# Altium PCB HV_DAC_1PPM.PcbDoc (part 3 of 5)
Units mm, origin at the board's own origin, x right, y up, seen from the top; angles counter-clockwise.
Board outline 148 x 86 mm, 6 copper layers (Layer 1, Layer 2, Layer 3, Layer 4, Layer 5, Layer 6), stack 1.615 mm thick; 392 components, 227 nets, 1037 pads, 645 vias.
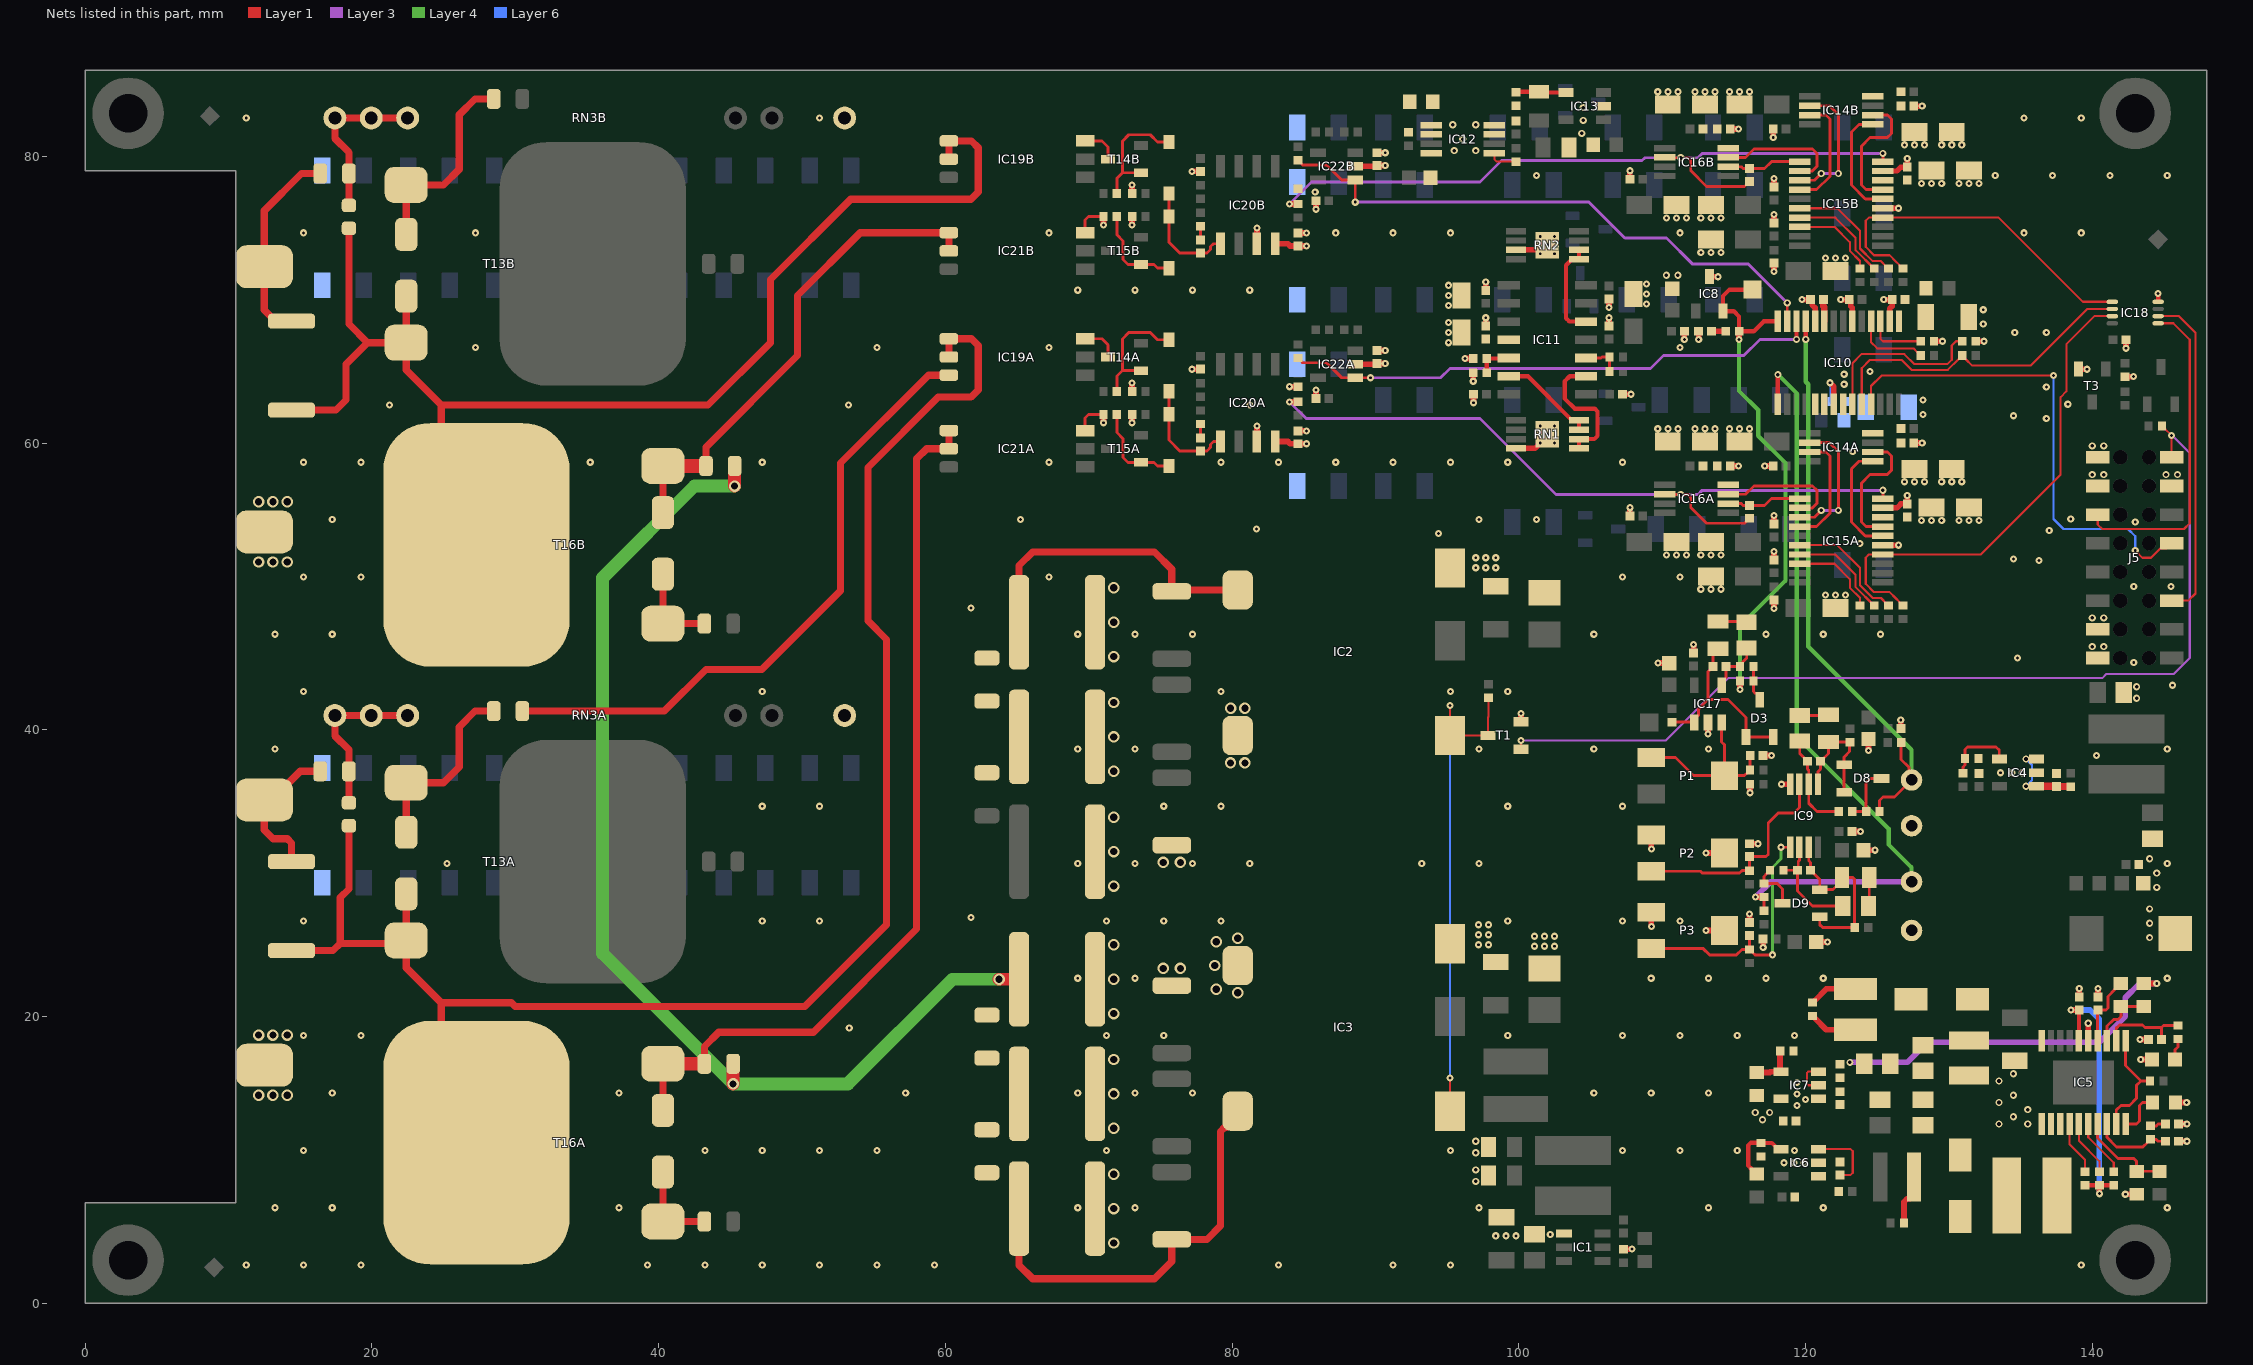
[diagram p6: the nets of this part, all layers, seen from the top]

## Part data (continued)
C54 C58: library part CC0603_1UF_16V_10%_X7R, "Non-polarised capacitor", Case=0603, Manufacturer=GENERIC, Manufacturer1 ComponentHeight=0.9mm, Manufacturer1 Example="YAGEO PHYCOMP", Manufacturer1 Part Number=223878615663, Tolerance=±10%, Voltage=16V, Author="CERN DEM JLC", Component Type=Standard, CreateDate=12/3/2007, HelpURL=\\cern.ch\dfs\Applications\Altium\Datasheets\CC0603_X7R_PHYCOMP.pdf, LatestRevisionDate=4/17/2015, Manufacturer Part Number=CC0603_1UF_16V_10%_X7R, Mounted=Yes, Part Description="SMD Multilayer Chip Ceramic Capacitor", Part Number=CC0603_1UF_16V_10%_X7R, Pin Count=2, Sense=No, SMD=Yes, Socket=No, Status=None, TC=X7R
C71A C71B: library part CC0402_10PF_50V_5%_C0G, "Non-polarised capacitor", Case=0402, Manufacturer=GENERIC, Manufacturer1 ComponentHeight=0.55mm, Manufacturer1 Example=KEMET, Manufacturer1 Part Number=C0402C100J5GACTU, Tolerance=±5%, Voltage=50V, Author="CERN DEM JLC", Component Type=Standard, CreateDate=12/3/2007, HelpURL="\\cern.ch\dfs\Applications\Altium\Datasheets\CC0402_C0G_KEMET_(Commercial Grade).pdf", LatestRevisionDate=4/22/2015, Manufacturer Part Number=CC0402_10PF_50V_5%_C0G, Mounted=Yes, Part Description="SMD Multilayer Chip Ceramic Capacitor", Part Number=CC0402_10PF_50V_5%_C0G, Pin Count=2, Sense=No, SMD=Yes, Socket=No, Status=Preferred, TC=C0G/NP0
C83A C83B: library part CC0402_22NF_50V_5%_X7R, "Non-polarised capacitor", Case=0402, Manufacturer=GENERIC, Manufacturer1 ComponentHeight=0.55mm, Manufacturer1 Example=KEMET, Manufacturer1 Part Number=C0402C223J5RAC, Tolerance=±5%, Voltage=50V, Author="CERN DEM BC", Component Type=Standard, CreateDate=7/15/2020, HelpURL=\\cern.ch\dfs\Applications\Altium\Datasheets\CC0402_X7R_KEMET.pdf, LatestRevisionDate=7/15/2020, Manufacturer Part Number=CC0402_22NF_50V_5%_X7R, Mounted=Yes, Part Description="SMD Multilayer Chip Ceramic Capacitor", Part Number=CC0402_22NF_50V_5%_X7R, Pin Count=2, Sense=No, SMD=Yes, Socket=No, Status=Preferred, TC=X7R
C85A C85B: library part CC0603_3.3NF_100V_1%_C0G, "Non-polarised capacitor", Case=0603, Manufacturer=GENERIC, Manufacturer1 ComponentHeight=0.87mm, Manufacturer1 Example=KEMET, Manufacturer1 Part Number=C0603C332F1GEC, Tolerance=±1%, Voltage=100V, Author="CERN DEM HF", Component Type=Standard, CreateDate=2/7/2024, HelpURL=\\cern.ch\dfs\Applications\Altium\Datasheets\CC0603_ESD_C0G_KEMET.pdf, LatestRevisionDate=2/7/2024, Manufacturer Part Number=CC0603_3.3NF_100V_1%_C0G, Mounted=Yes, Part Description="SMD Multilayer Chip Ceramic Capacitor", Part Number=CC0603_3.3NF_100V_1%_C0G, Pin Count=2, Sense=No, SMD=Yes, Socket=No, Status=None, TC=C0G/NP0
D1 D2: "Schottky Diode", Case=DO-214AC, Manufacturer="ON SEMICONDUCTOR", Manufacturer Part Number=MBRA340T3, Power=3A, Voltage=40V, Author="CERN DEM JLC", Bonding=No, Component Type=Standard, ComponentHeight=2.20mm, CreateDate=6/18/2012, Device=MBRA340T3G, HelpURL=\\cern.ch\dfs\Applications\Altium\Datasheets\MBRA340T3G.pdf, LatestRevisionDate=5/24/2022, Mounted=Yes, PackageDescription="DO-214-AC/SMA Diode, Molded Body; 5.21mm L X 2.60mm W X 2.20mm H, IPC Medium Density", Part Description="Schottky Power Rectifier", Part Number=MBRA340T3G, Pin Count=2, PressFit=No, Sense=No, SMD=Yes, Socket=No
D3 D8 D9: "Dual Common Anode Zener Diode", Case=SOT23-3, Manufacturer=PANASONIC, Power=200mA, Voltage=6.2V, Author="CERN DEM JLC", Bonding=No, Component Type=Standard, ComponentHeight=1.40mm, CreateDate=30/09/2014, Device=DZ3X062D0L, HelpURL=\\cern.ch\dfs\Applications\Altium\Datasheets\DZ3X062D0L.pdf, LatestRevisionDate=30/09/2014, Manufacturer Part Number=DZ3X062D0L, Mounted=Yes, PackageDescription="SOT, 0.95mm Pitch; 3 Pin, 1.60mm W X 2.975mm L X 1.40mm H Body, IPC Medium Density", Part Description="Dual Common Anode Silicon Epitaxial Planar Diode", Part Number=DZ3X062D0L, Pin Count=3, PressFit=No, Sense=No, SMD=Yes, Socket=No
D4A D4B D7A D7B: "Zener Diode", Case=DO-214AC, Manufacturer="ON SEMICONDUCTOR", Manufacturer Part Number=1SMA5931B, Power=1.5W, Voltage=18V, Author="CERN DEM BC", Bonding=No, Component Type=Standard, ComponentHeight=2.20mm, CreateDate=4/23/2020, Device=1SMA5931BT3G, HelpURL=\\cern.ch\dfs\Applications\Altium\Datasheets\1SMA5931BT3G.pdf, LatestRevisionDate=5/24/2022, Mounted=Yes, PackageDescription="DO-214-AC/SMA Diode, Molded Body; 5.21mm L X 2.60mm W X 2.20mm H, IPC Medium Density", Part Description="Zener Voltage Regulators", Part Number=1SMA5931BT3G, Pin Count=2, PressFit=No, Sense=No, SMD=Yes, Socket=No
D5A D5B D6A D6B: "Diode", Case=SOD-123, Manufacturer="VISHAY SEMICONDUCTORS", Power=150mA, Voltage=75V, Author="CERN DEM JLC", Bonding=No, Component Type=Standard, ComponentHeight=1.35mm, CreateDate=5/15/2017, Device=1N4448W, HelpURL=\\cern.ch\dfs\Applications\Altium\Datasheets\1N4448W.pdf, LatestRevisionDate=5/15/2017, Manufacturer Part Number=1N4448W, Mounted=Yes, PackageDescription="SOD Diode (SOD-123); 2.70mm W X 1.55mm L X 1.35mm H body, IPC Medium Density", Part Description="Surface Mount Small Signal Fast Switching Diode", Part Number=1N4448W, Pin Count=2, PressFit=No, Sense=No, SMD=Yes, Socket=No
FTG1 FTG2 FTG3 FTG4 FTG5 FTG6: library part FIDUCIAL_TARGET_S100-200, "Fiducial Target", Author="CERN DEM JLC", Component Type="Standard (No BOM)", ComponentHeight=0mm, CreateDate=09.02.2010, Family=Fiducial, HelpURL=Undefined, LatestRevisionDate=04.04.2012, Mounted=No, PackageDescription="Square Fiducial Target, Top Layer, 1.0mm, Top Solder 2.0mm, Keepout =2.0mm", Part Description="Square Fiducial Target, Top Layer, 1.0mm, Top Solder 2.0mm, Keepout =2.0mm", Part Number=FIDUCIAL_TARGET_S100-200, Pin Count=1, Sense=No, SMD=Yes, Socket=No, Status=None
IC1: "4.2V TO 18V INPUT, 2A LOW IQ SYNCHRONOUS BUCK CONVERTER", Case=SOT23-6, Manufacturer="DIODES INCORPORATED", Manufacturer Part Number=AP62201WU, Author="CERN DEM HF", Bonding=No, Component Type=Standard, ComponentHeight=1.1mm, CreateDate=1/7/2022, Device=AP62201WU-7, HelpURL=\\cern.ch\dfs\Applications\Altium\Datasheets\AP6220x.pdf, LatestRevisionDate=3/21/2022, Mounted=Yes, PackageDescription="SOT23, 0.95mm Pitch; 6 Pin, 1.625mm W X 2.90mm L X 1.00mm H body, IPC Medium Density", Part Description="4.2V To 18V Input, 2A Low Iq Synchronous Buck Converter", Part Number=AP62201WU-7, Pin Count=6, PressFit=No, Sense=No, SMD=Yes, Socket=No
IC2 IC3: "XP POWER, AG Series, DC/HVDC Converter", Manufacturer="XP POWER", Author="CERN DEM BC", Bonding=No, Component Type=Standard, ComponentHeight=3.3mm, CreateDate=9/18/2020, Device=AG20P-5, HelpURL=\\cern.ch\dfs\Applications\Altium\Datasheets\XPPOWER_AG-Series.pdf, LatestRevisionDate=9/18/2020, Manufacturer Part Number=AG20P-5, Mounted=Yes, PackageDescription="AG Series, DC/HVDC Converter, Body W 11.43mm x L 23.37mm x H 6.35mm", Part Description="5VDC to 0-2kVDC, Iout (max) 0.5mA, 1W DC-HVDC Converter", Part Number=AG20P-5, Pin Count=5, PressFit=No, Sense=No, SMD=Yes, Socket=No
IC4 IC6 IC13: "Adjustable Positive LDO Regulator, 1.2V Min, 20V Max, 0.42V Dropout, CMOS, PDSO5", Case/Package=SOT-23-5, Dropout Voltage=200mV, Input Bias Current=1uA, Manufacturer="Analog Devices", Max Operating Temperature=125°C, Max Output current=200mA, Max Output Voltage=19.58V, Max Supply Current=320uA, Max Supply Voltage=20V, Min Current Limit=250mA, Min Input Voltage=2.7V, Min Operating Temperature=-40°C, Min Output Voltage=1.2V, Operating Supply Current=180uA, Output Voltage=19.8V, Package Quantity=3000, Power Supply Rejection Ratio (PSRR)=50dB, Quiescent Current=140uA, Supplier Part Number=505-ADP7118AUJZ-R7CT-ND, Accuracy=0.8%, Category="Voltage Regulators - Linear", ComponentLink1Description=http://www.farnell.com/datasheets/2250589.pdf?src-supplier=Farnell, ComponentLink1URL=http://www.farnell.com/datasheets/2250589.pdf?src-supplier=Farnell, ComponentLink2Description=http://www.mouser.com/ds/2/609/ADP7118-876130.pdf?src-supplier=Mouser, ComponentLink2URL=http://www.mouser.com/ds/2/609/ADP7118-876130.pdf?src-supplier=Mouser, ComponentLink3Description=https://www.analog.com/media/en/technical-documentation/data-sheets/ADP7118.pdf?src-supplier=Digikey, ComponentLink3URL=https://www.analog.com/media/en/technical-documentation/data-sheets/ADP7118.pdf?src-supplier=Digikey, ComponentLink4Description=http://www.analog.com/static/imported-files/data_sheets/ADP7118.pdf?src-supplier=Avnet, ComponentLink4URL=http://www.analog.com/static/imported-files/data_sheets/ADP7118.pdf?src-supplier=Avnet, ComponentLink5Description=https://datasheet.octopart.com/ADP7118AUJZ-R7-Analog-Devices-datasheet-80865365.pdf?src-supplier=Newark, ComponentLink5URL=https://datasheet.octopart.com/ADP7118AUJZ-R7-Analog-Devices-datasheet-80865365.pdf?src-supplier=Newark, ComponentLink6Description=https://datasheet.octopart.com/ADP7118AUJZ-R7-Analog-Devices-datasheet-140248909.pdf?src-supplier=Element14, ComponentLink6URL=https://datasheet.octopart.com/ADP7118AUJZ-R7-Analog-Devices-datasheet-140248909.pdf?src-supplier=Element14, ComponentLink7Description=https://datasheet.octopart.com/ADP7118AUJZ-R7-Analog-Devices-datasheet-140566823.pdf?src-supplier=Arrow.cn, ComponentLink7URL=https://datasheet.octopart.com/ADP7118AUJZ-R7-Analog-Devices-datasheet-140566823.pdf?src-supplier=Arrow.cn, Contact Plating=Tin,Matte, Lead Free="Contains Lead", Manufacturer Part Number=ADP7118AUJZ-R7, Mounting Technology="Surface Mount", Number of Outputs=1, Number of Regulators=1, Output Configuration=Positive, Output Current=200mA, Output Type=Adjustable, Packaging="Tape and Reel", Pins=5, Polarity=Positive, Pricing="1=2.73, 10=2.033, 25=1.8596, 100=1.6689, 250=1.57808, 500=1.52332, 1000=1.47827 (USD)", RoHS=Yes, RoHS Compliant=Yes, Series=-, Stock=3209, Supplier=Digikey
IC5: "1A/0.6A, DC-to-DC Switching Regulator with Independent Positive and Negative Outputs", Case=SSOP20, Manufacturer="ANALOG DEVICES", Manufacturer Part Number=ADP5070ARE, Author="CERN DEM JLC", Bonding=No, Component Type=Standard, ComponentHeight=1.2mm, CreateDate=6/21/2017, Device=ADP5070AREZ, HelpURL=\\cern.ch\dfs\Applications\Altium\Datasheets\ADP5070AREZ.pdf, LatestRevisionDate=4/1/2022, Mounted=Yes, PackageDescription="SOP, 0.65mm Pitch; 20 Pin, 4.40mm W X 6.50mm L X 1.20mm H Body (w/Thermal Tab 3.05mm X 4.25mm), IPC Medium Density", Part Description="1A/0.6A, DC-to-DC Switching Regulator with Independent Positive and Negative Outputs", Part Number=ADP5070AREZ, Pin Count=20, PressFit=No, Sense=No, SMD=Yes, Socket=No
IC7: "-1.22V to -27V, -200mA, Adjustable, Low Noise, Negative Linear Regulator", Case=SOT23-5, Manufacturer="ANALOG DEVICES", Manufacturer Part Number=ADP7182AUJ, Author="CERN DEM JLC", Bonding=No, Component Type=Standard, ComponentHeight=0.9mm, CreateDate=6/16/2014, Device=ADP7182AUJZ-R7, HelpURL=\\cern.ch\dfs\Applications\Altium\Datasheets\ADP7182AUJZ-R7.pdf, LatestRevisionDate=4/4/2022, Mounted=Yes, PackageDescription="SOT23, 0.95mm Pitch; 5 Pin, 1.75mm W X 3.00mm L X 0.90mm H body, IPC Medium Density", Part Description="-1.22V to -27V, -200mA, Adjustable, Low Noise, Negative Linear Regulator", Part Number=ADP7182AUJZ-R7, Pin Count=5, PressFit=No, Sense=No, SMD=Yes, Socket=No
IC8: "-20° to +100°C ±3°C Precision Centigrade Temperature Sensors", Case=SOT23, Manufacturer="TEXAS INSTRUMENTS", Author="CERN DEM JLC", Bonding=No, Component Type=Standard, ComponentHeight=1.12mm, CreateDate=19/01/2011, Device=LM45CIM3/NOPB, HelpURL=\\cern.ch\dfs\Applications\Altium\Datasheets\LM45CIM3-NOPB.pdf, LatestRevisionDate=19/01/2011, Manufacturer Part Number=LM45CIM3/NOPB, Mounted=Yes, PackageDescription="SOT, 0.95mm Pitch; 3 Pin, 1.30mm W X 2.92mm L X 1.12mm H body, IPC Medium Density", Part Description="-20° to +100°C ±3°C Precision Centigrade Temperature Sensors", Part Number=LM45CIM3/NOPB, Pin Count=3, PressFit=No, Sense=No, SMD=Yes, Socket=No
IC9 IC14A IC14B: "Dual Operational Amplifier", Case=MSOP8, Manufacturer="ANALOG DEVICES", Manufacturer Part Number=AD8676ARM, Author="CERN DEM JLC", Bonding=No, Component Type=Standard, ComponentHeight=1.1mm, CreateDate=12/17/2013, Device=AD8676ARMZ, HelpURL=\\cern.ch\dfs\Applications\Altium\Datasheets\AD8676ARMZ.pdf, LatestRevisionDate=3/31/2022, Mounted=Yes, PackageDescription="SOP, 0.65mm Pitch; 8 Pin, 3.00mm W X 3.00mm L X 1.10mm H body, IPC Medium Density", Part Description="Ultraprecision, 36 V, 2.8 nV/sqrt Hz Dual Rail-to-Rail Output Operational Amplifier", Part Number=AD8676ARMZ, Pin Count=8, PressFit=No, Sense=No, SMD=Yes, Socket=No
IC10: "24-Bit Analog-to-Digital Converter for Temperature Sensors", Case=TSSOP28, Manufacturer="TEXAS INSTRUMENTS", Author="CERN DEM JLC", Bonding=No, Component Type=Standard, ComponentHeight=1.2mm, CreateDate=3/19/2012, Device=ADS1248IPWR, HelpURL=\\cern.ch\dfs\Applications\Altium\Datasheets\ADS1248IPWR.pdf, LatestRevisionDate=3/19/2012, Manufacturer Part Number=ADS1248IPWR, Mounted=Yes, PackageDescription="SOP, 0.65mm Pitch; 28 Pin, 4.40mm W X 9.70mm L X 1.20mm H body, IPC Medium Density", Part Description="24-Bit Analog-to-Digital Converter for Temperature Sensors", Part Number=ADS1248IPWR, Pin Count=28, PressFit=No, Sense=No, SMD=Yes, Socket=No
IC11: "Quad Operational Amplifier", Case=SOIC14, Manufacturer="ANALOG DEVICES", Manufacturer Part Number=ADA4077-4AR, Author="CERN DEM JLC", Bonding=No, Component Type=Standard, ComponentHeight=1.75mm, CreateDate=5/22/2018, Device=ADA4077-4ARZ, HelpURL=\\cern.ch\dfs\Applications\Altium\Datasheets\ADA4077-4ARZ.pdf, LatestRevisionDate=3/31/2022, Mounted=Yes, PackageDescription="SOIC 14, Pitch 1.27mm - Body 4x8.75mm, IPC Medium Density", Part Description="Quad 4 MHz, 7 nV/sqr Hz, Low Offset and Drift, High Precision Amplifier", Part Number=ADA4077-4ARZ, Pin Count=14, PressFit=No, Sense=No, SMD=Yes, Socket=No
IC12: library part LTC6655BHMS8-5#PBF, "0.25ppm Noise, Low Drift Precision Buffered Voltage Reference", Case=SSOP8, Manufacturer="LINEAR TECHNOLOGY", Author="CERN DEM JLC", Bonding=No, Component Type=Standard, ComponentHeight=1.1mm, CreateDate=6/7/2012, Device=LTC6655BHMS8-5, HelpURL=\\cern.ch\dfs\Applications\Altium\Datasheets\LTC6655BHMS8-5#PBF.pdf, LatestRevisionDate=6/7/2012, Manufacturer Part Number=LTC6655BHMS8-5, Mounted=Yes, PackageDescription="SOP, 8-Leads, Body 3.1x3.1mm (max), Pitch 0.65mm, IPC Medium Density", Part Description="5V, 0.25ppm Noise, Low Drift Precision Buffered Voltage Reference", Part Number=LTC6655BHMS8-5#PBF, Pin Count=8, PressFit=No, Sense=No, SMD=Yes, Socket=No
IC15A IC15B: "1 ppm 20-Bit, ±1 LSB INL, Voltage Output DAC", Case=TSSOP20, Manufacturer="ANALOG DEVICES", Manufacturer Part Number=AD5791BRU, Author="CERN DEM JLC", Bonding=No, Component Type=Standard, ComponentHeight=1.2mm, CreateDate=5/11/2011, Device=AD5791BRUZ, HelpURL=\\cern.ch\dfs\Applications\Altium\Datasheets\AD5791BRUZ.pdf, LatestRevisionDate=3/24/2022, Mounted=Yes, PackageDescription="SOP, 0.65mm Pitch; 20 Pin, 4.40mm W X 6.50mm L X 1.20mm H body, IPC Medium Density", Part Description="1 ppm 20-Bit, ±1 LSB INL, Voltage Output DAC", Part Number=AD5791BRUZ, Pin Count=20, PressFit=No, Sense=No, SMD=Yes, Socket=No
IC16A IC16B: "Operational Amplifier with Offset 1-8", Case=MSOP8, Manufacturer="ANALOG DEVICES", Manufacturer Part Number=AD8675ARM, Author="CERN DEM JMW", Bonding=No, Component Type=Standard, ComponentHeight=1.1mm, CreateDate=9/6/2011, Device=AD8675ARMZ, HelpURL=\\cern.ch\dfs\Applications\Altium\Datasheets\AD8675ARMZ.pdf, LatestRevisionDate=3/31/2022, Mounted=Yes, PackageDescription="SOP, 0.65mm Pitch; 8 Pin, 3.00mm W X 3.00mm L X 1.10mm H body, IPC Medium Density", Part Description="36V Precision, 2.8nV/sqrt Hz Rail-to-Rail Output Operational Amplifier", Part Number=AD8675ARMZ, Pin Count=8, PressFit=No, Sense=No, SMD=Yes, Socket=No
IC17 IC22A IC22B: "2.2nV/sqrt Hz, Low-Power, 36-V Operational Amplifier", Case="SOT 23-5", Manufacturer="TEXAS INSTRUMENTS", Component Type=Standard, Device=OPA207IDBVR, Manufacturer Part Number=OPA207IDBVR, PackageDescription="SOT, 0.95mm pitch; 5 pin, 1.60mm W X 2.90mm L X 1.45mm H body, IPC Medium Density", Part Description="2.2nV/sqrt Hz, Low-Power, 36-V Operational Amplifier", Part Number=OPA207IDBVR
IC18: "IC DECODER/DEMUX 1X2: 4 8VSSOP Decoder/Demultiplexer 1 x 2: 4 8-VSSOP", Case/Package=VSSOP, High Level Output Current=32mA, Manufacturer="Texas Instruments", Max Operating Temperature=85°C, Max Supply Voltage=5.5V, Min Operating Temperature=-40°C, Min Supply Voltage=1.65V, Quiescent Current=10uA, Supplier Part Number=595-SN74LVC1G139DCUR, Category="Integrated Circuits (ICs)", ComponentLink1Description=https://datasheet.ciiva.com/1888/sn74lvc1g139-1888859.pdf?src-supplier=Digikey, ComponentLink1URL=https://datasheet.ciiva.com/1888/sn74lvc1g139-1888859.pdf?src-supplier=Digikey, ComponentLink2Description=https://datasheet.ciiva.com/1888/sn74lvc1g139-1888860.pdf?src-supplier=Digikey, ComponentLink2URL=https://datasheet.ciiva.com/1888/sn74lvc1g139-1888860.pdf?src-supplier=Digikey, ComponentLink3Description=https://datasheet.ciiva.com/14293/sn74lvc1g139-14293589.pdf?src-supplier=Avnet, ComponentLink3URL=https://datasheet.ciiva.com/14293/sn74lvc1g139-14293589.pdf?src-supplier=Avnet, ComponentLink4Description=https://datasheet.ciiva.com/14294/sn74lvc1g139-14294935.pdf?src-supplier=Avnet, ComponentLink4URL=https://datasheet.ciiva.com/14294/sn74lvc1g139-14294935.pdf?src-supplier=Avnet, ComponentLink5Description=https://datasheet.ciiva.com/46430/1847422-46430989.pdf?src-supplier=Element14, ComponentLink5URL=https://datasheet.ciiva.com/46430/1847422-46430989.pdf?src-supplier=Element14, Height=900um, Independent Circuits=1, Lead Free=5697LeadFree, Length=2.3mm, Logic Function=Decoder,Demultiplexer, Low Level Output Current=32mA, Manufacturer Part Number=SN74LVC1G139DCUR, Mounting Technology="Surface Mount", Number of Bits=1, Number of Channels=1NUMBER, Number of Circuits=1, Number of Elements=1, Number of Input Lines=2, Number of Inputs=2, Number of Output Lines=4, Number of Outputs=4, Packaging="Tape and Reel", Pins=8, Polarity=Inverting, Pricing="1=0.38, 10=0.261, 50=0.235, 100=0.207, 1000=0.178, 10000=0.158 (USD)", Propagation Delay=16.7ns, Reach SVHC Compliant=No, RoHS=Yes, RoHS Compliant=Yes, Series=74LVC, Stock=29396, Supplier=Mouser, Supply Type=Single, Technology=CMOS, Thickness=850um, Throw Configuration="4340Throw Configuration", Weight=0.000339oz, Width=2mm
IC19A IC19B IC21A IC21B: "Optoisolator Photovoltaic Output 5000Vrms 2 Channel", Case=SOIC6, Manufacturer=TOSHIBA, Author="CERN DEM HF", Bonding=No, Component Type=Standard, ComponentHeight=2.2mm, CreateDate=6/7/2022, Device=TLP3910(C20-TP,E, HelpURL=\\cern.ch\dfs\Applications\Altium\Datasheets\TLP3910.pdf, LatestRevisionDate=6/7/2022, Manufacturer Part Number=TLP3910(C20-TP,E, Mounted=Yes, PackageDescription="TOSHIBA Case, SOIC, 1.27mm Pitch; 6  Pin, 7.5mm W X 3.84mm", Part Description="Optoisolator Photovoltaic Output 5000Vrms 2 Channel", Part Number=TLP3910(C20-TP,E, Pin Count=6, PressFit=No, Sense=No, SMD=Yes, Socket=No
IC20A IC20B: "Dual Operational Amplifier", Case=SOIC8, Manufacturer="TEXAS INSTRUMENTS", Author="CERN DEM BC", Bonding=No, Component Type=Standard, ComponentHeight=1.75mm, CreateDate=8/24/2016, Device=OPA2277U, HelpURL=\\cern.ch\dfs\Applications\Altium\Datasheets\OPA2277U.pdf, LatestRevisionDate=8/24/2016, Manufacturer Part Number=OPA2277U, Mounted=Yes, PackageDescription="SOIC 8, Pitch 1.27mm - Body 4x5mm, IPC Medium Density", Part Description="Dual High Precision, Operational Amplifier", Part Number=OPA2277U, Pin Count=8, PressFit=No, Sense=No, SMD=Yes, Socket=No
J1 J2 J3 J4: library part SMD_PAD_4X3MM, "Pad", Author="CERN DEM JLC", Component Type="Standard (No BOM)", ComponentHeight=0mm, CreateDate=3/15/2010, Family="SMD Pad", HelpURL=Undefined, LatestRevisionDate=3/15/2010, Mounted=No, PackageDescription="4mm x  3mm SMD Pad", Part Description="4mm x 3mm SMD Pad", Part Number=SMD_PAD_4X3MM, Pin Count=1, Sense=No, SMD=Yes, Socket=No, Status=None
J5: library part 62131621821, "Socket Header WR-PHD, Pitch 2.00 mm, SMT, Vertical, dual row, 16 pin", Contact Resistance="20 mOhm", Insulation Resistance=">1000 MOhm", Operating Temperature="-40 to 105 degC", Rated Current="2 A", Working Voltage="200 VAC", ComponentLink1Description=Manufacturer, ComponentLink1URL=http://www.we-online.de, ComponentLink2Description=Datasheet, ComponentLink2URL=http://katalog.we-online.com/em/datasheet/62131621821.pdf, Mounting Technology=SMT, Orientation=Vertical, Part Number=62131621821, Pin Number=16, Pitch="2.00 mm", Published Date="Jan. 2018", Publisher="Wurth Elektronik", Row Number=dual
L1 L3: library part IND_4.7UH_20%_WURTH_WE-SPC_74408943047, "Inductor With Core", Manufacturer="WURTH ELEKTRONIK", Manufacturer Part Number=74408943047, Power=2.2A, Resistance=0.045R, Tolerance=±20%, Author="CERN DEM JLC", Component Type=Standard, ComponentHeight=4.1mm, CreateDate=11/24/2014, HelpURL=\\cern.ch\dfs\Applications\Altium\Datasheets\IND_WURTH_WE-SPC_74408943047.pdf, LatestRevisionDate=7/5/2017, Mounted=Yes, Part Description="SMD Shielded Power Inductor (WE-SPC Series)", Part Number=IND_4.7UH_20%_WURTH_WE-SPC_74408943047, Pin Count=2, Sense=No, SMD=Yes, Socket=No
L2: library part IND_10UH_20%_BOURNS_PM43, "Inductor With Core", Manufacturer=BOURNS, Manufacturer Part Number=PM43-100M-RC, Power=1.15A, Resistance=0.18R, Tolerance=±20%, Author="CERN DEM JLC", Component Type=Standard, ComponentHeight=3.5mm, CreateDate=5/17/2011, HelpURL=\\cern.ch\dfs\Applications\Altium\Datasheets\IND_BOURNS_PM43.pdf, LatestRevisionDate=5/17/2011, Mounted=Yes, Part Description="SMD Power Inductor", Part Number=IND_10UH_20%_BOURNS_PM43, Pin Count=2, Sense=No, SMD=Yes, Socket=No
L4: library part IND_15UH_20%_WURTH_WE-SPC_74408943150, "Inductor With Core", Manufacturer="WURTH ELEKTRONIK", Manufacturer Part Number=74408943150, Power=1.4A, Resistance=0.118R, Tolerance=±20%, Author="CERN DEM MR", Component Type=Standard, ComponentHeight=4.1mm, CreateDate=6/30/2017, HelpURL=\\cern.ch\dfs\Applications\Altium\Datasheets\IND_WURTH_WE-SPC_74408943150.pdf, LatestRevisionDate=7/5/2017, Mounted=Yes, Part Description="SMD Shielded Power Inductor (WE-SPC Series)", Part Number=IND_15UH_20%_WURTH_WE-SPC_74408943150, Pin Count=2, Sense=No, SMD=Yes, Socket=No
L5: library part IND_1.5UH_20%_COILCRAFT_XAL4020, "Inductor With Core", Manufacturer=COILCRAFT, Manufacturer Part Number=XAL4020-152ME, Power=5.2A, Resistance=0.02145R, Tolerance=±20%, Author="CERN DEM BC", Component Type=Standard, ComponentHeight=2.1mm, CreateDate=8/7/2019, HelpURL=\\cern.ch\dfs\Applications\Altium\Datasheets\IND_COILCRAFT_XAL4020.pdf, LatestRevisionDate=8/31/2023, Mounted=Yes, Part Description="SMD Shielded Power Inductor", Part Number=IND_1.5UH_20%_COILCRAFT_XAL4020, Pin Count=2, Sense=No, SMD=Yes, Socket=No
L6: library part IND_2.2UH_20%_MURATA_LQH44PN2R2MP0L, "Inductor With Core", Case=4040, Manufacturer=MURATA, Manufacturer Part Number=LQH44PN2R2MP0L, Power=1.8A, Resistance=0R049, Tolerance=±20%, Author="CERN DEM JLC", Component Type=Standard, ComponentHeight=1.8mm, CreateDate=2/14/2018, HelpURL=\\cern.ch\dfs\Applications\Altium\Datasheets\IND_MURATA_LQH44PN_P0.pdf, LatestRevisionDate=2/14/2018, Mounted=Yes, Part Description="Wire Wound Ferrite Inductor for Power Lines", Part Number=IND_2.2UH_20%_MURATA_LQH44PN2R2MP0L, Pin Count=2, Sense=No, SMD=Yes, Socket=No
L7: library part IND_0.68UH_20%_BOURNS_SRP3212, "Inductor", Manufacturer=BOURNS, Manufacturer Part Number=SRP3212-R68M, Power=6.2A, Resistance=0.020R, Tolerance=±20%, Author="CERN DEM HF", Component Type=Standard, ComponentHeight=1.2mm, CreateDate=6/23/2022, HelpURL=\\cern.ch\dfs\Applications\Altium\Datasheets\IND_BOURNS_SRP3212.pdf, LatestRevisionDate=6/23/2022, Mounted=Yes, Part Description="Shielded SMD Power Inductor", Part Number=IND_0.68UH_20%_BOURNS_SRP3212, Pin Count=2, Sense=No, SMD=Yes, Socket=No
L8: library part IND0603_MURATA_BLM18PG471SN1D, Case=0603, Manufacturer=MURATA, Manufacturer Part Number=BLM18PG471SN1D, Power=1A, Resistance=0.2R, Tolerance=±25%, Author="CERN DEM BC", Component Type=Standard, ComponentHeight=0.95mm, CreateDate=17.02.2021, HelpURL=\\cern.ch\dfs\Applications\Altium\Datasheets\IND0603_MURATA_BLM18P.pdf, LatestRevisionDate=17.02.2021, Mounted=Yes, Part Description="SMD EMIFIL Chip Ferrite Bead", Part Number=IND0603_MURATA_BLM18PG471SN1D, Pin Count=2, Sense=No, SMD=Yes, Socket=No
P1: library part TRIM_12T_100K_BOURNS_3224X-1-104E, "Trimming Potentiometer", Case=3224X, Manufacturer=BOURNS, Manufacturer Part Number=3224X-1-104E, Power=0.25W, Tolerance=±10%, Author="CERN DEM JLC", Component Type=Standard, ComponentHeight=5.3mm, CreateDate=12/18/2012, HelpURL=\\cern.ch\dfs\Applications\Altium\Datasheets\TRIM_BOURNS_3224X.pdf, LatestRevisionDate=12/18/2012, Mounted=Yes, Part Description="12 Turns SMD Trimpot® Trimming Potentiometer (Top Adjust)", Part Number=TRIM_12T_100K_BOURNS_3224X-1-104E, Pin Count=3, PressFit=No, Sense=No, SMD=Yes, Socket=No, TC=±100ppm/°C
P2 P3: library part TRIM_12T_10K_BOURNS_3224X-1-103E, "Trimming Potentiometer", Case=3224X, Manufacturer=BOURNS, Manufacturer Part Number=3224X-1-103E, Power=0.25W, Tolerance=±10%, Author="CERN DEM JLC", Component Type=Standard, ComponentHeight=5.3mm, CreateDate=12/18/2012, HelpURL=\\cern.ch\dfs\Applications\Altium\Datasheets\TRIM_BOURNS_3224X.pdf, LatestRevisionDate=12/18/2012, Mounted=Yes, Part Description="12 Turns SMD Trimpot® Trimming Potentiometer (Top Adjust)", Part Number=TRIM_12T_10K_BOURNS_3224X-1-103E, Pin Count=3, PressFit=No, Sense=No, SMD=Yes, Socket=No, TC=±100ppm/°C
R1 R2 R6 R7: library part R1206_100K_0.1%_0.4W_25PPM_VISHAY_PAT, "Resistor - 0.1%", Case=1206, Manufacturer="VISHAY DALE THIN FILM", Manufacturer Part Number=PAT1206E1003BS, Power=0.4W, Tolerance=±0.1%, Author="CERN DEM MR", Component Type=Standard, ComponentHeight=0.5mm, CreateDate=7/19/2016, HelpURL=\\cern.ch\dfs\Applications\Altium\Datasheets\R1206_VISHAY_PAT.pdf, LatestRevisionDate=6/28/2022, Mounted=Yes, Part Description="Precision Automotive Thin Film Chip Resistor 2kV ESD Rating", Part Number=R1206_100K_0.1%_0.4W_25PPM_VISHAY_PAT, Pin Count=2, PressFit=No, Sense=No, SMD=Yes, Socket=No, Status="Not Recommended", TC=±25ppm/°C
R3 R21: library part R0603_52K3_0.1%_0.063W_10PPM, "Resistor - 0.1%", Case=0603, Manufacturer=GENERIC, Manufacturer1 ComponentHeight=0.5mm, Manufacturer1 Example="TYCO HOLSWORTHY", Manufacturer1 Part Number=RN73C1J52K3BTDF, Power=0.063W, Tolerance=±0.1%, Author="CERN DEM JLC", Component Type=Standard, CreateDate=12/3/2007, HelpURL=\\cern.ch\dfs\Applications\Altium\Datasheets\R0603_Tyco_RN73.pdf, LatestRevisionDate=3/13/2008, Manufacturer Part Number=R0603_52K3_0.1%_0.063W_10PPM, Mounted=Yes, Part Description="Thin Film Chip Resistor", Part Number=R0603_52K3_0.1%_0.063W_10PPM, Pin Count=2, PressFit=No, Sense=No, SMD=Yes, Socket=No, Status="Not Recommended", TC=±10ppm
R4 R5 R8 R11 R13 R17 R18 R23 R24 R25 R26 R32 R63 R101 R102 R103 R105 R106 R107 R108A R108B R109A R109B R110A R110B R111A R111B R117A R117B R137 R138 R143 R144 R145 R146: library part R0402_10K_1%_0.0625W_100PPM, "Resistor - 1%", Case=0402, Manufacturer=GENERIC, Manufacturer1 ComponentHeight=0.4mm, Manufacturer1 Example="YAGEO PHYCOMP", Manufacturer1 Part Number=232270671003L, Power=0.0625W, Tolerance=±1%, Author="CERN DEM JLC", Component Type=Standard, HelpURL=\\cern.ch\dfs\Applications\Altium\Datasheets\R0402_Phycomp_RC0402.pdf, Manufacturer Part Number=R0402_10K_1%_0.0625W_100PPM, Mounted=Yes, Part Description="General Purpose Thick Film Chip Resistor", Part Number=R0402_10K_1%_0.0625W_100PPM, Pin Count=2, PressFit=No, Sense=No, SMD=Yes, Socket=No, Status="Not Recommended", TC=±100ppm/°C
  R4 R5 R8 R11 R13 R17 R18 R23 R24 R25 R26 R32 R101 R102 R103 R105 R106 R107 R108A R108B R109A R109B R110A R110B R111A R111B R117A R117B R137 R138 R145 R146: CreateDate=12/3/2007, LatestRevisionDate=10/17/2012
  R63 R143 R144: CreateDate=03.12.2007, LatestRevisionDate=17.10.2012
R9 R15 R29: library part R0402_1R_1%_0.0625W_200PPM, "Resistor - 1%", Case=0402, Manufacturer=GENERIC, Manufacturer1 ComponentHeight=0.4mm, Manufacturer1 Example="YAGEO PHYCOMP", Manufacturer1 Part Number=232270671008L, Power=0.0625W, Tolerance=±1%, Author="CERN DEM JLC", Component Type=Standard, CreateDate=12/3/2007, HelpURL=\\cern.ch\dfs\Applications\Altium\Datasheets\R0402_Phycomp_RC0402.pdf, LatestRevisionDate=10/17/2012, Manufacturer Part Number=R0402_1R_1%_0.0625W_200PPM, Mounted=Yes, Part Description="General Purpose Thick Film Chip Resistor", Part Number=R0402_1R_1%_0.0625W_200PPM, Pin Count=2, PressFit=No, Sense=No, SMD=Yes, Socket=No, Status="Not Recommended", TC=±200ppm/°C
R10: library part R0402_31K6_0.1%_0.063W_25PPM_YAGEO_RT, "Resistor - 0.1%", Case=0402, Manufacturer=YAGEO, Manufacturer Part Number=RT0402BRD0731K6L, Power=0.063W, Tolerance=±0.1%, Voltage=50V, Author="CERN DEM BC", Component Type=Standard, ComponentHeight=0.35mm, CreateDate=7/30/2020, HelpURL=\\cern.ch\dfs\Applications\Altium\Datasheets\R0402_YAGEO_RT.pdf, LatestRevisionDate=7/30/2020, Mounted=Yes, Part Description="Thin Film Chip Resistor", Part Number=R0402_31K6_0.1%_0.063W_25PPM_YAGEO_RT, Pin Count=2, PressFit=No, Sense=No, SMD=Yes, Socket=No, Status="Not Recommended", TC=±25ppm/°C
R12: library part R0402_4R7_1%_0.0625W_200PPM, "Resistor - 1%", Case=0402, Manufacturer=GENERIC, Manufacturer1 ComponentHeight=0.4mm, Manufacturer1 Example="YAGEO PHYCOMP", Manufacturer1 Part Number=232270674708L, Power=0.0625W, Tolerance=±1%, Author="CERN DEM JLC", Component Type=Standard, CreateDate=12/3/2007, HelpURL=\\cern.ch\dfs\Applications\Altium\Datasheets\R0402_Phycomp_RC0402.pdf, LatestRevisionDate=10/17/2012, Manufacturer Part Number=R0402_4R7_1%_0.0625W_200PPM, Mounted=Yes, Part Description="General Purpose Thick Film Chip Resistor", Part Number=R0402_4R7_1%_0.0625W_200PPM, Pin Count=2, PressFit=No, Sense=No, SMD=Yes, Socket=No, Status="Not Recommended", TC=±200ppm/°C
R14: library part R0402_22K_1%_0.0625W_100PPM, "Resistor - 1%", Case=0402, Manufacturer=GENERIC, Manufacturer1 ComponentHeight=0.4mm, Manufacturer1 Example="YAGEO PHYCOMP", Manufacturer1 Part Number=232270672203L, Power=0.0625W, Tolerance=±1%, Author="CERN DEM JLC", Component Type=Standard, CreateDate=12/3/2007, HelpURL=\\cern.ch\dfs\Applications\Altium\Datasheets\R0402_Phycomp_RC0402.pdf, LatestRevisionDate=10/17/2012, Manufacturer Part Number=R0402_22K_1%_0.0625W_100PPM, Mounted=Yes, Part Description="General Purpose Thick Film Chip Resistor", Part Number=R0402_22K_1%_0.0625W_100PPM, Pin Count=2, PressFit=No, Sense=No, SMD=Yes, Socket=No, Status="Not Recommended", TC=±100ppm/°C
R16 R30: library part R0603_105K_0.1%_0.063W_10PPM, "Resistor - 0.1%", Case=0603, Manufacturer=GENERIC, Manufacturer1 ComponentHeight=0.5mm, Manufacturer1 Example="TYCO HOLSWORTHY", Manufacturer1 Part Number=RN73C1J105KBTDF, Power=0.063W, Tolerance=±0.1%, Author="CERN DEM JLC", Component Type=Standard, CreateDate=12/3/2007, HelpURL=\\cern.ch\dfs\Applications\Altium\Datasheets\R0603_Tyco_RN73.pdf, LatestRevisionDate=3/13/2008, Manufacturer Part Number=R0603_105K_0.1%_0.063W_10PPM, Mounted=Yes, Part Description="Thin Film Chip Resistor", Part Number=R0603_105K_0.1%_0.063W_10PPM, Pin Count=2, PressFit=No, Sense=No, SMD=Yes, Socket=No, Status="Not Recommended", TC=±10ppm
R19: library part R0402_30K1_1%_0.0625W_100PPM, "Resistor - 1%", Case=0402, Manufacturer=GENERIC, Manufacturer1 ComponentHeight=0.4mm, Manufacturer1 Example="YAGEO PHYCOMP", Manufacturer1 Part Number=RC0402FR-0730K1L, Power=0.0625W, Tolerance=±1%, Author="CERN DEM BC", Component Type=Standard, CreateDate=3/16/2021, HelpURL=\\cern.ch\dfs\Applications\Altium\Datasheets\R0402_YAGEO_RC_L.pdf, LatestRevisionDate=3/16/2021, Manufacturer Part Number=R0402_30K1_1%_0.0625W_100PPM, Mounted=Yes, Part Description="General Purpose Thick Film Chip Resistor", Part Number=R0402_30K1_1%_0.0625W_100PPM, Pin Count=2, PressFit=No, Sense=No, SMD=Yes, Socket=No, Status=Preferred, TC=±100ppm/°C
R20: library part R0603_63K4_0.1%_0.063W_10PPM, "Resistor - 0.1%", Case=0603, Manufacturer=GENERIC, Manufacturer1 ComponentHeight=0.5mm, Manufacturer1 Example="TYCO HOLSWORTHY", Manufacturer1 Part Number=RN73C1J63K4BTDF, Power=0.063W, Tolerance=±0.1%, Author="CERN DEM JLC", Component Type=Standard, CreateDate=12/3/2007, HelpURL=\\cern.ch\dfs\Applications\Altium\Datasheets\R0603_Tyco_RN73.pdf, LatestRevisionDate=3/13/2008, Manufacturer Part Number=R0603_63K4_0.1%_0.063W_10PPM, Mounted=Yes, Part Description="Thin Film Chip Resistor", Part Number=R0603_63K4_0.1%_0.063W_10PPM, Pin Count=2, PressFit=No, Sense=No, SMD=Yes, Socket=No, Status="Not Recommended", TC=±10ppm
R22: library part R0603_3K57_1%_0.063W_50PPM, "Resistor - 1%", Case=0603, Manufacturer=GENERIC, Manufacturer1 ComponentHeight=0.55mm, Manufacturer1 Example="TYCO NEOHM", Manufacturer1 Part Number=CPF0603F3K57C1, Power=0.063W, Tolerance=±1%, Author="CERN DEM JLC", Component Type=Standard, CreateDate=5/20/2010, HelpURL=\\cern.ch\dfs\Applications\Altium\Datasheets\R0603_TYCO_CPF.pdf, LatestRevisionDate=5/20/2010, Manufacturer Part Number=R0603_3K57_1%_0.063W_50PPM, Mounted=Yes, Part Description="General Purpose Thick Film Chip Resistor", Part Number=R0603_3K57_1%_0.063W_50PPM, Pin Count=2, PressFit=No, Sense=No, SMD=Yes, Socket=No, Status=None, TC=±50ppm/°C
R27: library part R0603_2K8_0.1%_0.063W_10PPM, "Resistor - 0.1%", Case=0603, Manufacturer=GENERIC, Manufacturer1 ComponentHeight=0.5mm, Manufacturer1 Example="TYCO HOLSWORTHY", Manufacturer1 Part Number=RN73C1J2K8BTDF, Power=0.063W, Tolerance=±0.1%, Author="CERN DEM JLC", Component Type=Standard, CreateDate=12/3/2007, HelpURL=\\cern.ch\dfs\Applications\Altium\Datasheets\R0603_Tyco_RN73.pdf, LatestRevisionDate=3/13/2008, Manufacturer Part Number=R0603_2K8_0.1%_0.063W_10PPM, Mounted=Yes, Part Description="Thin Film Chip Resistor", Part Number=R0603_2K8_0.1%_0.063W_10PPM, Pin Count=2, PressFit=No, Sense=No, SMD=Yes, Socket=No, Status="Not Recommended", TC=±10ppm
R28: library part R0603_54K9_0.1%_0.063W_10PPM, "Resistor - 0.1%", Case=0603, Manufacturer=GENERIC, Manufacturer1 ComponentHeight=0.5mm, Manufacturer1 Example="TYCO HOLSWORTHY", Manufacturer1 Part Number=RN73C1J54K9BTDF, Power=0.063W, Tolerance=±0.1%, Author="CERN DEM JLC", Component Type=Standard, CreateDate=12/3/2007, HelpURL=\\cern.ch\dfs\Applications\Altium\Datasheets\R0603_Tyco_RN73.pdf, LatestRevisionDate=3/13/2008, Manufacturer Part Number=R0603_54K9_0.1%_0.063W_10PPM, Mounted=Yes, Part Description="Thin Film Chip Resistor", Part Number=R0603_54K9_0.1%_0.063W_10PPM, Pin Count=2, PressFit=No, Sense=No, SMD=Yes, Socket=No, Status="Not Recommended", TC=±10ppm
R31: library part R0402_10R_1%_0.0625W_200PPM, "Resistor - 1%", Case=0402, Manufacturer=GENERIC, Manufacturer1 ComponentHeight=0.4mm, Manufacturer1 Example="YAGEO PHYCOMP", Manufacturer1 Part Number=232270671009L, Power=0.0625W, Tolerance=±1%, Author="CERN DEM JLC", Component Type=Standard, CreateDate=6/24/2009, HelpURL=\\cern.ch\dfs\Applications\Altium\Datasheets\R0402_Phycomp_RC0402.pdf, LatestRevisionDate=10/17/2012, Manufacturer Part Number=R0402_10R_1%_0.0625W_200PPM, Mounted=Yes, Part Description="General Purpose Thick Film Chip Resistor", Part Number=R0402_10R_1%_0.0625W_200PPM, Pin Count=2, PressFit=No, Sense=No, SMD=Yes, Socket=No, Status="Not Recommended", TC=±200ppm/°C
R33 R34 R35 R36 R37 R38 R39 R40 R41 R42 R43 R44 R45 R46 R47 R48 R49 R50 R52 R53 R54 R55 R56 R57 R58 R59 R60 R65 R66 R67 R68 R69 R70 R71 R72 R73 R74 R75 R76 R77 R78 R79 R80 R81 R82 R84 R85 R86 R87 R88 R89 R90 R91 R92: library part R1206_68R_1%_0.25W_100PPM, "Resistor - 1%", Case=1206, Manufacturer=GENERIC, Manufacturer1 ComponentHeight=0.65mm, Manufacturer1 Example="NIC COMPONENT", Manufacturer1 Part Number=NRC12F68R0TRF, Power=0.25W, Tolerance=±1%, Author="CERN DEM JLC", Component Type=Standard, CreateDate=03/12/2007, HelpURL=\\cern.ch\dfs\Applications\Altium\Datasheets\R1206_NIC_NRC.pdf, LatestRevisionDate=13/03/2008, Manufacturer Part Number=R1206_68R_1%_0.25W_100PPM, Mounted=Yes, Part Description="General Purpose Thick Film Chip Resistor", Part Number=R1206_68R_1%_0.25W_100PPM, Pin Count=2, PressFit=No, Sense=No, SMD=Yes, Socket=No, Status=Preferred, TC=±100ppm/°C
R51 R135 R136: library part "R0805_10M_1%_0.125W_100PPM_VISHAY_CRCW e3", "Resistor - 1%", Case=0805, Manufacturer="VISHAY DALE", Manufacturer Part Number=CRCW080510M0FKEA, Power=0.125W, Tolerance=±1%, Author="CERN DEM BC", Component Type=Standard, ComponentHeight=0.5mm, CreateDate=2019-11-12, HelpURL="\\cern.ch\dfs\Applications\Altium\Datasheets\R0805_VISHAY_CRCW e3.pdf", LatestRevisionDate=2019-11-12, Mounted=Yes, Part Description="150V, Standard Thick Film Chip Resistor", Part Number="R0805_10M_1%_0.125W_100PPM_VISHAY_CRCW e3", Pin Count=2, PressFit=No, Sense=No, SMD=Yes, Socket=No, Status=None, TC=±100ppm/°C
R61 R139 R141: library part R0402_1k_1%_0.0625W_100PPM, "Resistor - 1%", Case=0402, Manufacturer=GENERIC, Manufacturer1 ComponentHeight=0.4mm, Manufacturer1 Example="YAGEO PHYCOMP", Manufacturer1 Part Number=232270671002L, Manufacturer Part Number=R0402_1K_1%_0.0625W_100PPM, Power=0.0625W, Tolerance=±1%, Author="CERN DEM JLC", ClassName=Artix, Component Type=Standard, CreateDate=03.12.2007, HelpURL=\\cern.ch\dfs\Applications\Altium\Datasheets\R0402_Phycomp_RC0402.pdf, LatestRevisionDate=17.10.2012, Mounted=Yes, Part Description="General Purpose Thick Film Chip Resistor", Part Number=R0402_1K_1%_0.0625W_100PPM, Pin Count=2, PressFit=No, Sense=No, SMD=Yes, Socket=No, Status="Not Recommended", TC=±100ppm/°C
R62 R94 R95 R96 R97 R114A R114B R140 R142: library part R0402_100K_1%_0.0625W_100PPM, "Resistor - 1%", Case=0402, Manufacturer=GENERIC, Manufacturer1 ComponentHeight=0.4mm, Manufacturer1 Example="YAGEO PHYCOMP", Manufacturer1 Part Number=232270671004L, Power=0.0625W, Tolerance=±1%, Author="CERN DEM JLC", Component Type=Standard, HelpURL=\\cern.ch\dfs\Applications\Altium\Datasheets\R0402_Phycomp_RC0402.pdf, Manufacturer Part Number=R0402_100K_1%_0.0625W_100PPM, Mounted=Yes, Part Description="General Purpose Thick Film Chip Resistor", Part Number=R0402_100K_1%_0.0625W_100PPM, Pin Count=2, PressFit=No, Sense=No, SMD=Yes, Socket=No, Status="Not Recommended", TC=±100ppm/°C
  R62 R140 R142: CreateDate=03/12/2007, LatestRevisionDate=17/10/2012
  R94 R95 R96 R97 R114A R114B: CreateDate=12/3/2007, LatestRevisionDate=10/17/2012
R64: library part R0402_75R_1%_0.0625W_100PPM, "Resistor - 1%", Case=0402, Manufacturer=GENERIC, Manufacturer1 ComponentHeight=0.4mm, Manufacturer1 Example="YAGEO PHYCOMP", Manufacturer1 Part Number=232270677509L, Power=0.0625W, Tolerance=±1%, Author="CERN DEM JLC", Component Type=Standard, CreateDate=03/12/2007, HelpURL=\\cern.ch\dfs\Applications\Altium\Datasheets\R0402_Phycomp_RC0402.pdf, LatestRevisionDate=17/10/2012, Manufacturer Part Number=R0402_75R_1%_0.0625W_100PPM, Mounted=Yes, Part Description="General Purpose Thick Film Chip Resistor", Part Number=R0402_75R_1%_0.0625W_100PPM, Pin Count=2, PressFit=No, Sense=No, SMD=Yes, Socket=No, Status="Not Recommended", TC=±100ppm/°C
R83: library part R0402_7K5_1%_0.0625W_100PPM, "Resistor - 1%", Case=0402, Manufacturer=GENERIC, Manufacturer1 ComponentHeight=0.4mm, Manufacturer1 Example="YAGEO PHYCOMP", Manufacturer1 Part Number=232270677502L, Power=0.0625W, Tolerance=±1%, Author="CERN DEM JLC", Component Type=Standard, CreateDate=03.12.2007, HelpURL=\\cern.ch\dfs\Applications\Altium\Datasheets\R0402_Phycomp_RC0402.pdf, LatestRevisionDate=17.10.2012, Manufacturer Part Number=R0402_7K5_1%_0.0625W_100PPM, Mounted=Yes, Part Description="General Purpose Thick Film Chip Resistor", Part Number=R0402_7K5_1%_0.0625W_100PPM, Pin Count=2, PressFit=No, Sense=No, SMD=Yes, Socket=No, Status="Not Recommended", TC=±100ppm/°C
R93: library part R0402_4K7_1%_0.0625W_100PPM, "Resistor - 1%", Case=0402, Manufacturer=GENERIC, Manufacturer1 ComponentHeight=0.4mm, Manufacturer1 Example="YAGEO PHYCOMP", Manufacturer1 Part Number=232270674702L, Power=0.0625W, Tolerance=±1%, Author="CERN DEM JLC", Component Type=Standard, CreateDate=03.12.2007, HelpURL=\\cern.ch\dfs\Applications\Altium\Datasheets\R0402_Phycomp_RC0402.pdf, LatestRevisionDate=17.10.2012, Manufacturer Part Number=R0402_4K7_1%_0.0625W_100PPM, Mounted=Yes, Part Description="General Purpose Thick Film Chip Resistor", Part Number=R0402_4K7_1%_0.0625W_100PPM, Pin Count=2, PressFit=No, Sense=No, SMD=Yes, Socket=No, Status="Not Recommended", TC=±100ppm/°C
R98 R99: library part R0603_0R1_1%_0.1W_200PPM, "Resistor - 1%", Case=0603, Manufacturer=GENERIC, Manufacturer1 ComponentHeight=0.55mm, Manufacturer1 Example=BOURNS, Manufacturer1 Part Number=CRL0603-FW-R100ELF, Power=0.1W, Tolerance=±1%, Author="CERN DEM JMW", Component Type=Standard, CreateDate=11/26/2019, HelpURL=\\cern.ch\dfs\Applications\Altium\Datasheets\R0603_BOURNS_CRL.pdf, LatestRevisionDate=11/26/2019, Manufacturer Part Number=R0603_0R1_1%_0.1W_200PPM, Mounted=Yes, Part Description="Low Value Chip Resistor", Part Number=R0603_0R1_1%_0.1W_200PPM, Pin Count=2, PressFit=No, Sense=No, SMD=Yes, Socket=No, Status=Preferred, TC=±200ppm/°C
R100 R121A R121B: library part R0805_47K_1%_0.125W_100PPM, "Resistor - 1%", Case=0805, Manufacturer=GENERIC, Manufacturer1 ComponentHeight=0.6mm, Manufacturer1 Example="NIC COMPONENT", Manufacturer1 Part Number=NRC10F4702TRF, Power=0.125W, Tolerance=±1%, Author="CERN DEM JLC", Component Type=Standard, CreateDate=12/3/2007, HelpURL=\\cern.ch\dfs\Applications\Altium\Datasheets\R0805_NIC_NRC.pdf, LatestRevisionDate=3/13/2008, Manufacturer Part Number=R0805_47K_1%_0.125W_100PPM, Mounted=Yes, Part Description="General Purpose Thick Film Chip Resistor", Part Number=R0805_47K_1%_0.125W_100PPM, Pin Count=2, PressFit=No, Sense=No, SMD=Yes, Socket=No, Status=Preferred, TC=±100ppm/°C
R104: library part R0402_0R_JUMPER, "Resistor", Case=0402, Manufacturer=GENERIC, Manufacturer1 ComponentHeight=0.4mm, Manufacturer1 Example="YAGEO PHYCOMP", Manufacturer1 Part Number=232270591001L, Author="CERN DEM JLC", Component Type=Standard, CreateDate=12/3/2007, HelpURL=\\cern.ch\dfs\Applications\Altium\Datasheets\R0402_Phycomp_RC0402.pdf, LatestRevisionDate=10/17/2012, Manufacturer Part Number=R0402_0R_JUMPER, Mounted=Yes, Part Description="1A (0.05R Max DC Resistance) Zero Ohm Jumper", Part Number=R0402_0R_JUMPER, Pin Count=2, PressFit=No, Sense=No, SMD=Yes, Socket=No, Status="Not Recommended"
R112A R112B R113A R113B R119A R119B R122A R122B: library part R0805_100R_1%_0.125W_100PPM, "Resistor - 1%", Case=0805, Manufacturer=GENERIC, Manufacturer1 ComponentHeight=0.6mm, Manufacturer1 Example="NIC COMPONENT", Manufacturer1 Part Number=NRC10F4700TRF, Power=0.125W, Tolerance=±1%, Author="CERN DEM JLC", Component Type=Standard, CreateDate=12/3/2007, HelpURL=\\cern.ch\dfs\Applications\Altium\Datasheets\R0805_NIC_NRC.pdf, LatestRevisionDate=3/13/2008, Manufacturer Part Number=R0805_100R_1%_0.125W_100PPM, Mounted=Yes, Part Description="General Purpose Thick Film Chip Resistor", Part Number=R0805_100R_1%_0.125W_100PPM, Pin Count=2, PressFit=No, Sense=No, SMD=Yes, Socket=No, Status=Preferred, TC=±100ppm/°C
R115A R115B R116A R116B R120A R120B R124A R124B R131A R131B R132A R132B R133A R133B R134A R134B: library part R0402_1K_1%_0.0625W_100PPM, "Resistor - 1%", Case=0402, Manufacturer=GENERIC, Manufacturer1 ComponentHeight=0.4mm, Manufacturer1 Example="YAGEO PHYCOMP", Manufacturer1 Part Number=232270671002L, Power=0.0625W, Tolerance=±1%, Author="CERN DEM JLC", Component Type=Standard, CreateDate=12/3/2007, HelpURL=\\cern.ch\dfs\Applications\Altium\Datasheets\R0402_Phycomp_RC0402.pdf, LatestRevisionDate=10/17/2012, Manufacturer Part Number=R0402_1K_1%_0.0625W_100PPM, Mounted=Yes, Part Description="General Purpose Thick Film Chip Resistor", Part Number=R0402_1K_1%_0.0625W_100PPM, Pin Count=2, PressFit=No, Sense=No, SMD=Yes, Socket=No, Status="Not Recommended", TC=±100ppm/°C
R118A R118B: library part CRMV2512AF1K00FKEF, "CRMV2512AF 1K 1% 100 Ef E3", Manufacturer=Vishay, Supplier Part Number=71-CRMV2512AF1K00FKF, Category="Chip SMD Resistors", Manufacturer Part Number=CRMV2512AF1K00FKEF, Pricing="1=1.14, 10=0.655, 50=0.655, 100=0.422, 1000=0.305, 10000=0.261 (USD)", RoHS=No, Stock=4000, Supplier=Mouser
R123A R123B: library part R0402_2K_1%_0.0625W_100PPM, "Resistor - 1%", Case=0402, Manufacturer=GENERIC, Manufacturer1 ComponentHeight=0.4mm, Manufacturer1 Example="YAGEO PHYCOMP", Manufacturer1 Part Number=232270672002L, Power=0.0625W, Tolerance=±1%, Author="CERN DEM JLC", Component Type=Standard, CreateDate=12/3/2007, HelpURL=\\cern.ch\dfs\Applications\Altium\Datasheets\R0402_Phycomp_RC0402.pdf, LatestRevisionDate=10/17/2012, Manufacturer Part Number=R0402_2K_1%_0.0625W_100PPM, Mounted=Yes, Part Description="General Purpose Thick Film Chip Resistor", Part Number=R0402_2K_1%_0.0625W_100PPM, Pin Count=2, PressFit=No, Sense=No, SMD=Yes, Socket=No, Status="Not Recommended", TC=±100ppm/°C
R125 R126 R127 R128 R129 R130: library part R1210_2M0_0.1%_1/3W_25ppm, "RES, HV, 2010, 2 Mohm, 0.1%, 25 ppm, 1W", Case=2010, Manufacturer="Vishay Dale", Manufacturer1 ComponentHeight=0.65mm, Manufacturer Part Number=TNPV12102M00BEEA, Power=1/3W, Tolerance=±0.1%, Author=GK, Component Type=Standard, CreateDate=26.02.2015, HelpURL=\\cern.ch\dfs\Applications\Altium\Datasheets\R2010_WELWYN_LHVC.pdf, LatestRevisionDate=26.02.2015, Mounted=Yes, Part Description="Thick Film Chip Resistor", Part Number=R1210_2M0_0.1%_1/3W_25ppm, Pin Count=2, PressFit=No, Sense=No, SMD=Yes, Socket=No, Status=None, TC=±25ppm/°C
RN1 RN2: library part RN_10K_10K_LINEAR_LT5400ACMS8E-1#PBF, "DIL8 Resistor Network 4 Isolated Resistor 0.01% + Exposed Pad", Case=MSOP8, Manufacturer="LINEAR TECHNOLOGY", Manufacturer Part Number=LT5400ACMS8E-1, Power=4x0.8W, Tolerance=±0.01%, Author="CERN DEM JLC", Component Type=Standard, ComponentHeight=1.1mm, CreateDate=7/1/2014, HelpURL=\\cern.ch\dfs\Applications\Altium\Datasheets\RN_LINEAR_LT5400.pdf, LatestRevisionDate=2/3/2022, Mounted=Yes, Part Description="Quad Matched Resistor Network, Temperature Range  0°C to 70°C, LT5400 Series", Part Number=RN_10K_10K_LINEAR_LT5400ACMS8E-1#PBF, Pin Count=9, PressFit=No, Sense=No, SMD=Yes, Socket=No, TC=±0.2ppm/°C
RN3A RN3B: library part RN_19.98M_20K_CADDOCK_HVD5-A20M-050-05, "Ultra-Precision Voltage Dividers HVD Series", Manufacturer=CADDOCK, Manufacturer Part Number=HVD5-A20M-050-05, Power=31mW, Tolerance=±0.1%, Voltage=2500V, Author="CERN DEM HF", Component Type=Standard, ComponentHeight=15.5mm, CreateDate=27.04.2023, HelpURL=\\cern.ch\dfs\Applications\Altium\Datasheets\RN_CADDOCK_HVD.pdf, LatestRevisionDate=27.04.2023, Mounted=Yes, Part Description="Ultra-Precision Voltage Dividers HVD Series", Part Number=RN_19.98M_20K_CADDOCK_HVD5-A20M-050-05, Pin Count=5, PressFit=No, Sense=No, SMD=No, Socket=No, Status=None, TC=±5ppm/°C
T1 T3: "N-CHANNEL MOSFET WITH DIODE", Case=SOT23-3, Manufacturer="ON SEMICONDUCTOR", Manufacturer Part Number=BSS138L, Author="CERN DEM JLC", Bonding=No, Component Type=Standard, ComponentHeight=1.11mm, CreateDate=3/23/2009, Device=BSS138LT1G, HelpURL=\\cern.ch\dfs\Applications\Altium\Datasheets\BSS138LT1G.pdf, LatestRevisionDate=5/25/2022, Mounted=Yes, PackageDescription="SOT23, 0.95mm Pitch; 3 Pin, 1.40mm W X 3.00mm L X 1.10mm H body, IPC Medium Density", Part Description="50V, 200mA N-Channel Enhancement Mode Field-Effect Transistor", Part Number=BSS138LT1G, Pin Count=3, PressFit=No, Sense=No, SMD=Yes, Socket=No
T2: "P-CHANNEL MOSFET WITH DIODE", Case=SOT23-3, Manufacturer="DIODES INCORPORATED", Author="CERN DEM JLC", Bonding=No, Component Type=Standard, ComponentHeight=1.4mm, CreateDate=11/17/2014, Device=DMP2066LSN-7, HelpURL=\\cern.ch\dfs\Applications\Altium\Datasheets\DMP2066LSN-7.pdf, LatestRevisionDate=11/17/2014, Manufacturer Part Number=DMP2066LSN-7, Mounted=Yes, PackageDescription="SOT, 0.95mm Pitch; 3 Pin, 1.60mm W X 3.00mm L X 1.40mm H body, IPC Medium Density", Part Description="20V, 4.6A, P-Channel Enhancement Mode MOSFET", Part Number=DMP2066LSN-7, Pin Count=3, PressFit=No, Sense=No, SMD=Yes, Socket=No
T4 T5 T6 T7 T8 T9 T10 T11 T12: "N-CHANNEL MOSFET WITH DIODE", Case=SOT23-3, Manufacturer=NEXPERIA, Author="CERN DEM JLC", Bonding=No, Component Type=Standard, ComponentHeight=1.1mm, CreateDate=16.03.2010, Device=BSH103, HelpURL=\\cern.ch\dfs\Applications\Altium\Datasheets\BSH103.pdf, LatestRevisionDate=20.06.2017, Manufacturer Part Number=BSH103, Mounted=Yes, PackageDescription="SOT23, 3 pin, Pitch 0.95mm - 1.3mm W X 2.9mm L X 1.1mm H, IPC Medium Density", Part Description="30V 850mA N-Channel Enhancement Mode Field-Effect Transistor", Part Number=BSH103, Pin Count=3, PressFit=No, Sense=No, SMD=Yes, Socket=No